# Altium PCB pkg.PcbDoc
Units mm, origin at the board's own origin, x right, y up, seen from the top; angles counter-clockwise.
Board outline 97.41 x 97.92 mm, 2 copper layers (Top Layer, Bottom Layer); 45 components, 53 nets, 208 pads, 34 vias.
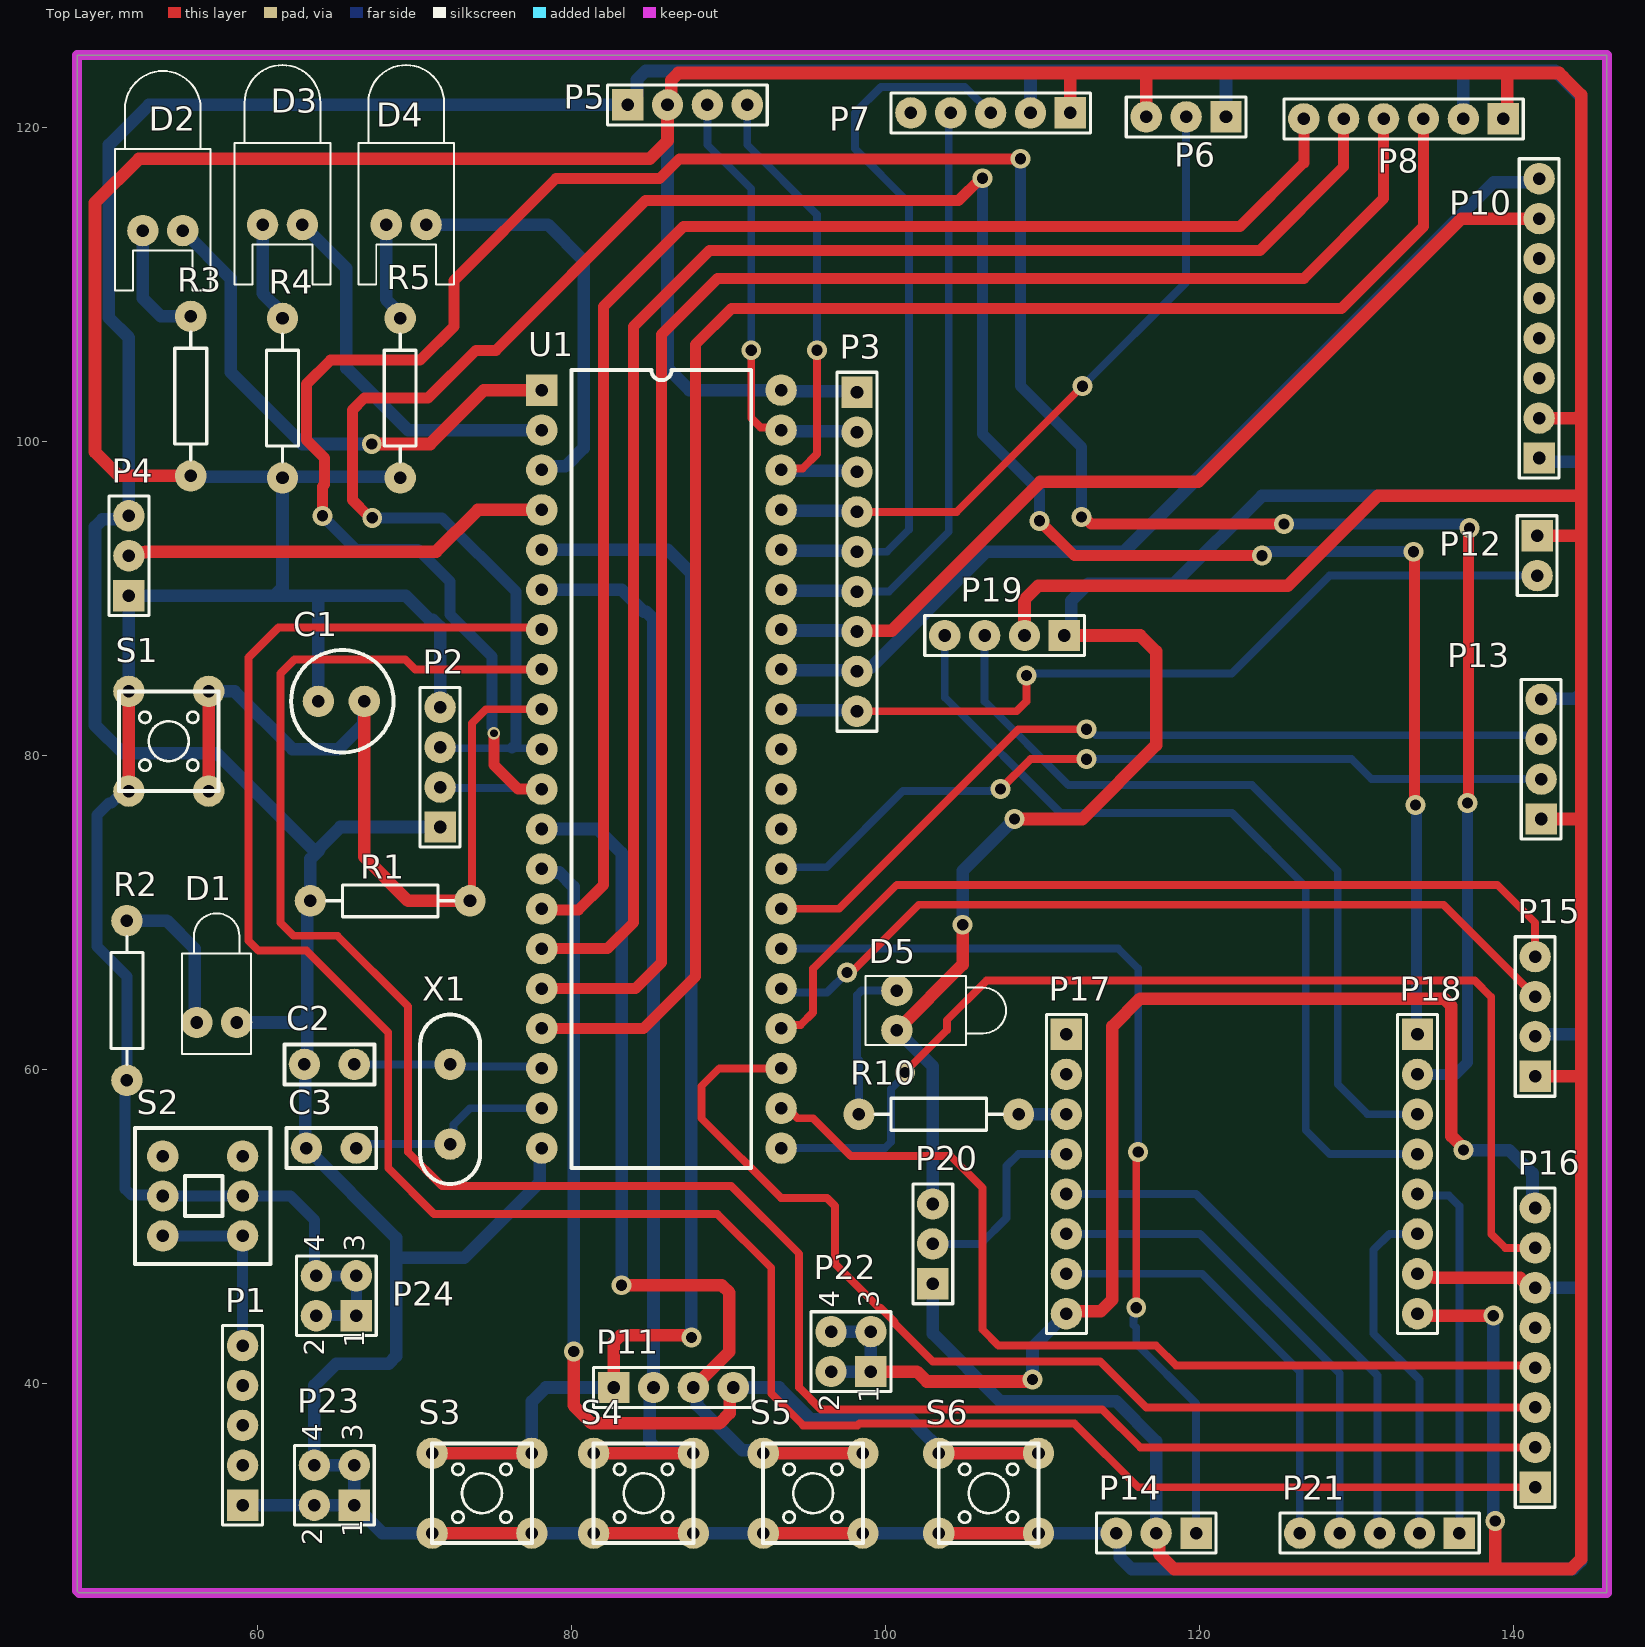
[diagram p0: Top Layer view]
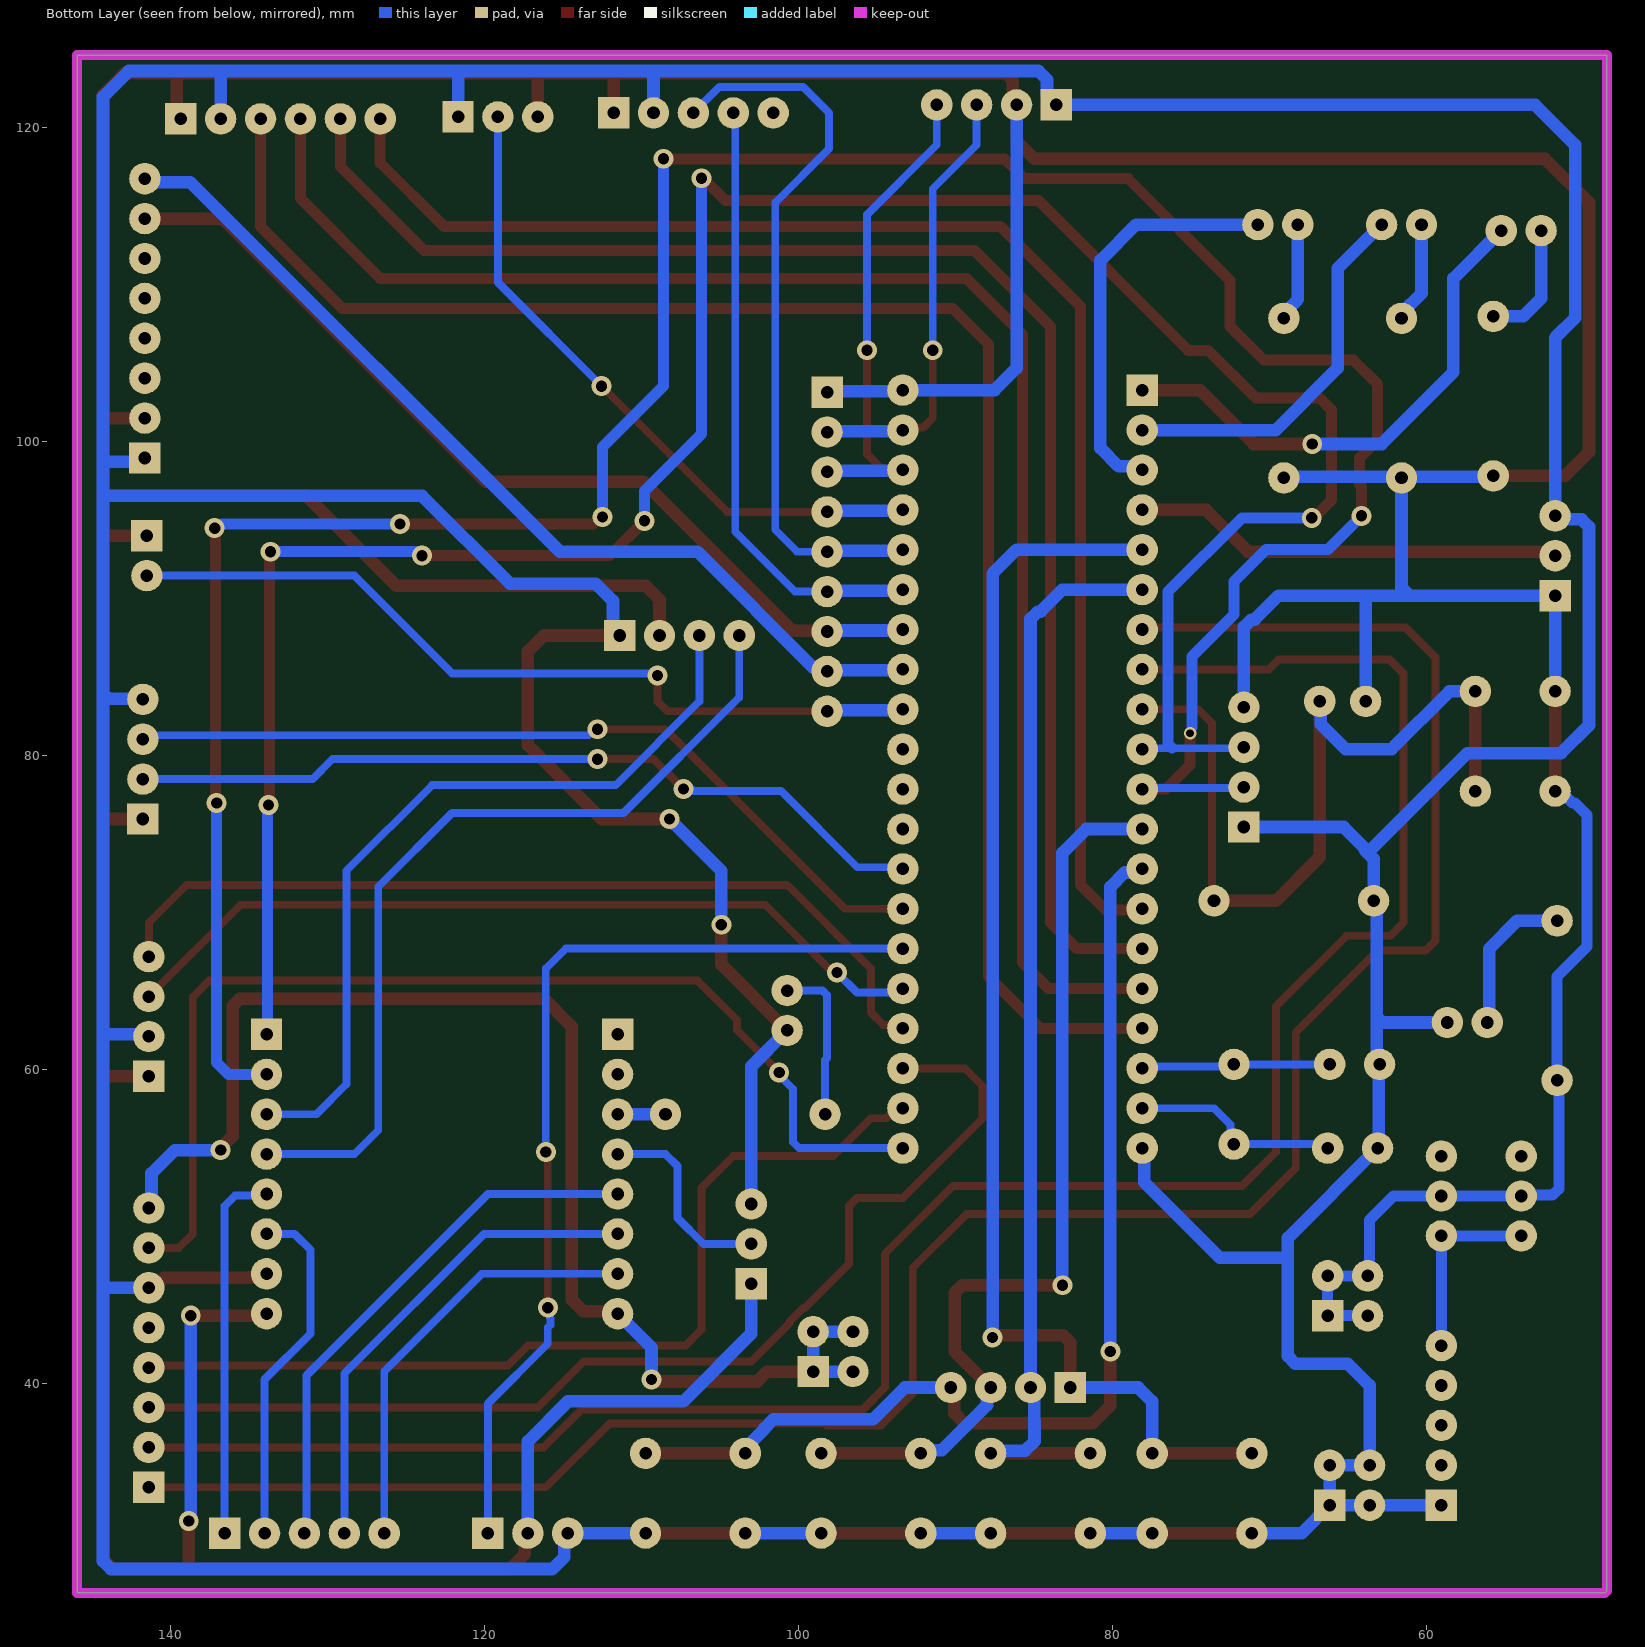
[diagram p1: Bottom Layer view, seen from below]

## Layer stack, top to bottom
Top Solder: solder mask 0.0102, Solder Resist, Dk 3.5
Top Layer: signal copper 0.0356
Dielectric 1: dielectric 0.32, FR-4, Dk 4.8
Bottom Layer: signal copper 0.0356
Bottom Solder: solder mask 0.0102, Solder Resist, Dk 3.5

## Board outline
48.514,26.797 48.514,124.587 145.923,124.587 145.923,26.67 48.641,26.67

## Design rules (kind name [scope] priority, off if disabled: settings)
Clearance [All] p1: gap=0.254 ignorepadtopadclearanceinfootprint=FALSE except(0: Arc-Hole Track-Hole SMDPad-Hole THPad-Hole Via-Hole Fill-Hole Poly-Hole Region-Hole Text-Hole)
PolygonConnect [All] p1: connectstyle=Relief reliefconductorwidth=0.254 reliefentries=4 polygonreliefangle="90 Angle" airgapwidth=0.254
RoutingVias [All] p1: holewidth=0.711 width=1.27 viastyle="Through Hole" minholewidth=0.711 minwidth=1.27 maxholewidth=0.711 maxwidth=1.27
SolderMaskExpansion [All] p1: expansion=0.102 istentingtop=FALSE
Width [All] p1: maxlimit=0.9 minlimit=0.5 preferedwidth=0.5
30 further rules are at their usual default settings.

## Components (designator, comment, footprint, x,y, rotation, side; value= is the part's Value field where it differs from the comment)
C1 "10uf" 电解电容 63.881,83.439 r0 top
C2 "22pf" 瓷片电容 66.167,60.325 r180 top
C3 "22pf" 瓷片电容 66.294,54.991 r180 top
D1 "LED1" LED-1 57.404,62.992 r90 top
D2 "LED1" LED-0 53.975,113.411 r180 top
D3 "LED2" LED-0 61.595,113.792 r180 top
D4 "LED3" LED-0 69.469,113.792 r180 top
D5 "LED1" LED-1 100.711,63.754 r0 top
P1 "USB" HDR1X5 59.055,32.258 r90 top
P2 "USART" HDR1X4 71.628,75.438 r90 top
P3 "排阻" ResPack9 98.171,92.964 r0 top
P4 "BEEP" HDR1X3 51.816,90.17 r90 top
P5 "OLED" HDR1X4 83.566,121.412 r0 top
P6 "DHT11" HDR1X3 121.666,120.65 r180 top
P7 "BH1750" HDR1X5 111.76,120.904 r180 top
P8 "步进电机" HDR1X6 139.319,120.523 r180 top
P10 "ADXL345" HDR1X8 141.605,98.933 r90 top
P11 "按键" HDR1X4 82.677,39.751 r0 top
P12 "风扇" HDR1X2 141.478,93.98 r270 top
P13 "MAX30100" HDR1X4 141.732,75.946 r90 top
P14 "红外遥控" HDR1X3 119.761,30.48 r180 top
P15 "PCF8591" HDR1X4 141.351,59.563 r90 top
P16 "RFID" HDR1X8 141.351,33.401 r90 top
P17 "wifi1" HDR1X8 111.506,62.23 r270 top
P18 "wifi2" HDR1X8 133.858,62.23 r270 top
P19 "WIFI_OLED" HDR1X4 111.379,87.63 r180 top
P20 "WIFI_DHT11" HDR1X3 102.997,46.355 r90 top
P21 "WIFI_IO" HDR1X5 136.525,30.48 r180 top
P22 "3.3V" HDR2X2 99.06,40.767 r90 top
P23 "GND" HDR2X2 66.167,32.258 r90 top
P24 "VCC" HDR2X2 66.294,44.323 r90 top
R1 "Res2" AXIAL-0.4 68.453,70.739 r180 top value=10K
R2 "Res2" AXIAL-0.4 51.689,64.389 r90 top value=220
R3 "Res1" AXIAL-0.4 55.753,102.87 r270 top value=1K
R4 "Res2" AXIAL-0.4 61.595,102.743 r270 top value=1K
R5 "Res2" AXIAL-0.4 69.088,102.743 r270 top value=1K
R10 "Res2" AXIAL-0.4 103.378,57.15 r180 top value=1K
S1 "SW-PE2" KEYTOUCH 51.816,84.074 r0 top
S2 "自锁开关" 自锁开关 59.055,49.403 r180 top
S3 "SW-PE2" KEYTOUCH 77.47,35.56 r270 top
S4 "SW-PE2" KEYTOUCH 81.407,30.48 r90 top
S5 "SW-PE2" KEYTOUCH 98.552,35.56 r270 top
S6 "SW-PE2" KEYTOUCH 103.378,30.48 r90 top
U1 "STC89C52" DIP40 78.105,103.251 r0 top
X1 "XTAL（晶振11.0592m）" XTAL 72.263,60.325 r270 top

## Footprints (in the part's own frame and the unit in brackets; to place one, negate y for a bottom-side part, rotate by r counter-clockwise, add the part's x,y. Pads: shape width x height; smd on the part's side, far side on the other; paste and mask are expansions set on the pad)
AXIAL-0.4 [mm] "Axial Device, Thru-Hole; 2 Leads; 0.4 in Pin Spacing"
  round 2 hole 0.8: 1(-5.08,0) 2(5.08,0)
  silkscreen extent -4.06,-1.02 4.06,1.02
DIP40 [mm]
  rect 2x2 hole 0.8: 1(0,0)
  round 2 hole 0.8: 2(0,-2.54) 3(0,-5.08) 4(0,-7.62) 5(0,-10.16) 6(0,-12.7) 7(0,-15.24) 8(0,-17.78) 9(0,-20.32) 10(0,-22.86) 11(0,-25.4) 12(0,-27.94) 13(0,-30.48) 14(0,-33.02) 15(0,-35.56) 16(0,-38.1) 17(0,-40.64) 18(0,-43.18) 19(0,-45.72) 20(0,-48.26) 21(15.24,-48.26) 22(15.24,-45.72) 23(15.24,-43.18) 24(15.24,-40.64) 25(15.24,-38.1) 26(15.24,-35.56) 27(15.24,-33.02) 28(15.24,-30.48) 29(15.24,-27.94) 30(15.24,-25.4) 31(15.24,-22.86) 32(15.24,-20.32) 33(15.24,-17.78) 34(15.24,-15.24) 35(15.24,-12.7) 36(15.24,-10.16) 37(15.24,-7.62) 38(15.24,-5.08) 39(15.24,-2.54) 40(15.24,0)
  silkscreen extent 1.91,-49.53 13.33,1.27
HDR1X2 [mm] "Connector; Header; 2 Position"
  rect 2x2 hole 0.8: 1(0,0)
  round 2 hole 0.8: 2(2.54,0)
  silkscreen extent -1.27,-1.27 3.81,1.27
HDR1X3 [mm] "Connector; Header; 3 Position"
  rect 2x2 hole 0.8: 1(0,0)
  round 2 hole 0.8: 2(2.54,0) 3(5.08,0)
  silkscreen extent -1.27,-1.27 6.35,1.27
HDR1X4 [mm] "Connector; Header; 4 Position"
  rect 2x2 hole 0.8: 1(0,0)
  round 2 hole 0.8: 2(2.54,0) 3(5.08,0) 4(7.62,0)
  silkscreen extent -1.27,-1.27 8.89,1.27
HDR1X5 [mm] "Connector; Header; 5 Position"
  rect 2x2 hole 0.8: 1(0,0)
  round 2 hole 0.8: 2(2.54,0) 3(5.08,0) 4(7.62,0) 5(10.16,0)
  silkscreen extent -1.27,-1.27 11.43,1.27
HDR1X6 [mm] "Connector; Header; 6 Position"
  rect 2x2 hole 0.8: 1(0,0)
  round 2 hole 0.8: 2(2.54,0) 3(5.08,0) 4(7.62,0) 5(10.16,0) 6(12.7,0)
  silkscreen extent -1.27,-1.27 13.97,1.27
HDR1X8 [mm] "Connector; Header; 8 Position"
  rect 2x2 hole 0.8: 1(0,0)
  round 2 hole 0.8: 2(2.54,0) 3(5.08,0) 4(7.62,0) 5(10.16,0) 6(12.7,0) 7(15.24,0) 8(17.78,0)
  silkscreen extent -1.27,-1.27 19.05,1.27
HDR2X2 [mm] "Connector; Header; 2x2 Position"
  rect 2x2 hole 0.8: 1(0,0)
  round 2 hole 0.8: 2(0,2.54) 3(2.54,0) 4(2.54,2.54)
  silkscreen extent -1.27,-1.27 3.81,3.81
KEYTOUCH [mm] "轻触开关"
  round 2 hole 0.8: 1(0,-6.35) 1(0,0) 2(5.08,-6.35) 2(5.08,0)
  Top Layer lines w0.8: 0,-6.35 0,0 ; 5.08,-6.35 5.08,0 5.08,0.127
  silkscreen extent -0.64,-6.35 5.71,0
LED-0 [mm] "LED; 2 Leads"
  round 2 hole 0.8: 1(1.27,0) 2(-1.27,0)
  silkscreen extent -3.05,-10.16 3.05,3.81
LED-1 [mm] "Typical RED GaAs LED; 2 Leads"
  round 2 hole 0.8: 1(0,1.27) 2(0,-1.27)
  silkscreen extent -2,-2.2 6.95,2.2
ResPack9 [mm]
  rect 2x2 hole 0.8: 1(0,10.16)
  round 2 hole 0.8: 2(0,7.62) 3(0,5.08) 4(0,2.54) 5(0,0) 6(0,-2.54) 7(0,-5.08) 8(0,-7.62) 9(0,-10.16)
  silkscreen extent -1.27,-11.43 1.27,11.43
XTAL [mm]
  round 2 hole 0.8: 1(5.08,0) 2(0,0)
  silkscreen extent -3.18,-1.91 7.62,1.91
瓷片电容 [mm] "104"
  round 2 hole 0.8: 1(0,0) 2(3.175,0)
  silkscreen extent -1.27,-1.27 4.44,1.27
电解电容 [mm]
  round 2 hole 0.8: 1(0,0) 2(2.921,0)
  silkscreen extent -1.74,-3.26 4.79,3.26
自锁开关 [mm]
  round 2 hole 0.8: 1(0,0) 2(0,-2.54) 3(0,-5.08) 4(5.08,-5.08) 5(5.08,-2.54) 6(5.08,0)
  silkscreen extent -1.78,-6.86 6.86,1.78

## Part data
C1: library part 电解电容
C2 C3: library part 瓷片电容
D1 D5: "Typical RED GaAs LED", LatestRevisionDate=08-Jul-2005, LatestRevisionNote="Mech Layer 1 removed.", PackageReference=LED-1, Published=8-Jun-2000, Publisher="Altium Limited"
D2 D3 D4: library part LED0, "Typical INFRARED GaAs LED", LatestRevisionDate=08-Jul-2005, LatestRevisionNote="Mech Layer 1 removed.", PackageDescription="LED; 2 Leads", PackageReference=LED-0, Published=8-Jun-2000, Publisher="Altium Limited"
P1 P7 P21: library part "Header 5", "Header, 5-Pin", LatestRevisionDate=17-Jul-2002, LatestRevisionNote="Re-released for DXP Platform.", Publisher="Altium Limited"
P2 P5 P11 P13 P15 P19: library part "Header 4", "Header, 4-Pin", LatestRevisionDate=17-Jul-2002, LatestRevisionNote="Re-released for DXP Platform.", Publisher="Altium Limited"
P3: library part "Res Pack9"
P4 P6 P14 P20: library part "Header 3", "Header, 3-Pin", LatestRevisionDate=17-Jul-2002, LatestRevisionNote="Re-released for DXP Platform.", Publisher="Altium Limited"
P8: library part "Header 6", "Header, 6-Pin", LatestRevisionDate=17-Jul-2002, LatestRevisionNote="Re-released for DXP Platform.", Publisher="Altium Limited"
P10 P16 P17 P18: library part "Header 8", "Header, 8-Pin", LatestRevisionDate=17-Jul-2002, LatestRevisionNote="Re-released for DXP Platform.", Publisher="Altium Limited"
P12: library part "Header 2", "Header, 2-Pin", LatestRevisionDate=17-Jul-2002, LatestRevisionNote="Re-released for DXP Platform.", Publisher="Altium Limited"
P22 P23 P24: library part "Header 2X2", "Header, 2-Pin, Dual row", LatestRevisionDate=17-Jul-2002, LatestRevisionNote="Re-released for DXP Platform.", Publisher="Altium Limited"
R1 R2 R4 R5 R10: "Resistor", LatestRevisionDate=17-Jul-2002, LatestRevisionNote="Re-released for DXP Platform.", PackageDescription="Axial Device, Thru-Hole; 2 Leads; 0.4 in Pin Spacing", PackageReference=AXIAL-0.4, Published=8-Jun-2000, Publisher="Altium Limited"
R3: library part Res2, "Resistor", LatestRevisionDate=17-Jul-2002, LatestRevisionNote="Re-released for DXP Platform.", PackageDescription="Axial Device, Thru-Hole; 2 Leads; 0.4 in Pin Spacing", PackageReference=AXIAL-0.4, Published=8-Jun-2000, Publisher="Altium Limited"
X1: library part XTAL（晶振）

## Via types
v1: diameter 1.27, hole 0.711, Top Layer to Bottom Layer, 33 vias
v2: diameter 0.8, hole 0.5, Top Layer to Bottom Layer, 1 vias

## Nets (pads, with @x,y where several pads share a name; then routed paths per layer and width w, separated by ;. In a path a pad name is that pad's centre, name@x,y a point inside that pad or via, vN(x,y) a via of type N, cw(c..) or ccw(c..) an arc to the next point about the centre after c; other vN are vias at no path point)
3.3V: P16.8 P17.8 P22.1 P22.2 P22.3 P22.4 | length 82.6
  Top Layer w0.8: P22.1 101.981,40.767 102.616,40.132 v1@108.888,40.132 ; v1@109.25,40.169 109.34,40.259 v1(109.347,40.259) ; P17.8 111.674,44.618 113.706,44.618 114.427,45.339 114.427,62.738 116.205,64.516 135.548,64.516 136.017,64.047 136.017,55.753 v1@136.652,55.118
  Bottom Layer w0.8: P22.2 P22.1 P22.3 P22.4 ; v1(109.347,40.259) 109.347,42.291 P17.8 ; v1(136.779,54.864) 139.7,54.864 141.183,53.381 141.183,51.349 P16.8
ADXL_SDA: P3.7 P10.7 U1.34 | length 59.2
  Top Layer w0.8: P3.7 98.212,87.925 100.371,87.925 109.855,97.409 119.888,97.409 136.652,114.173 P10.7
  Bottom Layer w0.8: U1.34 93.408,87.947 98.108,87.947 P3.7
AXDL_SCL: P3.8 P10.8 U1.33 | length 61.3
  Bottom Layer w0.8: U1.33 93.408,85.407 98.108,85.407 P3.8 98.401,85.574 99.036,85.574 106.426,92.964 115.189,92.964 138.708,116.483 141.375,116.483 P10.8
BEEP: P4.2 U1.4 | length 27.5
  Top Layer w0.8: P4.2 52.046,92.94 52.86,92.94 52.885,92.964 71.374,92.964 74.041,95.631 U1.4
BH1750_SCL: P3.5 P7.3 U1.36 | length 46.7
  Bottom Layer w0.5: P3.5 100.076,92.964 101.473,94.361 101.473,115.189 98.044,118.618 98.044,120.904 99.695,122.555 105.029,122.555 P7.3
  Bottom Layer w0.8: U1.36 93.408,93.027 98.108,93.027 P3.5
BH1750_SDA: P3.6 P7.4 U1.35 | length 39
  Bottom Layer w0.5: P3.6 100.203,90.424 104.013,94.234 104.013,120.777 P7.4
  Bottom Layer w0.8: U1.35 93.408,90.487 98.108,90.487 P3.6
D3: P18.5 P21.1 | length 23.8
  Bottom Layer w0.5: P18.5 133.96,51.968 135.865,51.968 136.525,51.308 P21.1
D4: P18.6 P21.2 | length 22.5
  Bottom Layer w0.5: P18.6 132.08,49.53 131.064,48.514 131.064,43.18 133.985,40.259 P21.2
D6: P17.5 P21.3 | length 34.7
  Bottom Layer w0.5: P17.5 119.761,52.07 131.318,40.513 131.318,30.607 P21.3
D7: P17.6 P21.4 | length 31.2
  Bottom Layer w0.5: P17.6 120.015,49.53 128.905,40.64 P21.4
D8: P17.7 P21.5 | length 27.7
  Bottom Layer w0.5: P17.7 120.142,46.99 126.365,40.767 P21.5
DHT11_DATA: P3.4 P6.2 U1.37 | length 42.4
  Top Layer w0.5: P3.4 104.521,95.504 v1(112.522,103.505)
  Bottom Layer w0.5: v1(112.522,103.505) 119.126,110.109 P6.2
  Bottom Layer w0.8: U1.37 93.408,95.567 98.108,95.567 P3.4
FEE: P3.9 P12.2 U1.32 | length 52.4
  Top Layer w0.5: P3.9 108.331,82.804 108.966,83.439 v1(108.966,85.09)
  Bottom Layer w0.5: v1@109.22,85.217 122.035,85.217 128.258,91.44 P12.2
  Bottom Layer w0.8: U1.32 93.408,82.867 98.108,82.867 P3.9
GND: C2.2 C3.2 D1.2 D5.2 P1.1 P2.1 P4.3 P5.1 P6.1 P7.2 P8.2 P10.1 P13.4 P14.3 P15.2 P16.6 P18.7 P19.1 P20.3 P23.1 P23.2 P23.3 P23.4 R1.2 S3.2 S4.1 S5.2 S6.1 U1.20 | length 504.5
  Top Layer w0.8: D5.2 104.902,66.675 v1(104.902,69.215) ; v1(108.204,75.946) 112.522,75.946 117.221,80.645 117.221,86.614 116.205,87.63 P19.1 ; P18.7 134.088,46.76 134.902,46.76 134.927,46.736 140.391,46.736 141.026,46.101 P16.6
  Bottom Layer w0.5: R1.2@63.182,70.143 R1.2@63.627,70.587
  Bottom Layer w0.8: D1.2 62.801,62.992 63.182,63.373 ; P1.1 P23.2 P23.1 ; 63.817,73.977 65.278,75.438 P2.1 ; S3.2@71.12,30.48 67.945,30.48 P23.1 ; S3.2@77.47,30.48 S4.1@81.407,30.48 ; U1.20 77.978,54.864 77.978,52.832 73.152,48.006 68.834,48.006 ; S4.1@87.757,30.48 S5.2@92.202,30.48 ; S5.2@98.552,30.48 S6.1@103.378,30.48 ; D5.2 102.997,60.198 P20.3 ; v1(104.902,69.215) 104.902,72.644 v1@107.823,75.565 ; P7.2 109.22,123.571 ; S6.1@109.728,30.48 P14.3 114.911,30.25 114.911,28.941 115.658,28.194 143.764,28.194 144.272,28.702 144.272,46.355 ; P19.1 111.801,88.052 111.801,89.83 112.903,90.932 118.364,90.932 123.952,96.52 144.272,96.52 ; P6.1 121.666,123.571 ; P8.2 136.779,123.571 ; P16.6 144.018,46.101 144.272,46.355 ; P15.2 141.478,62.23 144.272,62.23 ; P10.1 141.859,98.679 144.272,98.679 ; P13.4 141.773,83.607 143.932,83.607 144.272,83.947 ; 63.182,63.373 63.182,60.515 C2.2 63.055,60.261 63.055,55.054 C3.2 68.834,49.276 68.834,48.006 ; 63.182,63.373 63.182,70.143 63.182,70.549 R1.2 63.373,73.406 63.944,73.977 63.563,73.977 57.404,80.137 51.435,80.137 49.657,81.915 49.657,94.552 50.126,95.02 51.586,95.02 P4.3 51.816,106.588 50.546,107.858 50.546,118.872 53.086,121.412 P5.1 84.166,122.012 84.166,123.028 84.709,123.571 109.22,123.571 ; P23.1 P23.3 P23.4 63.627,39.878 65.024,41.275 68.365,41.275 68.834,41.744 68.834,48.006 ; 109.22,123.571 121.666,123.571 ; 121.666,123.571 136.779,123.571 ; 136.779,123.571 142.621,123.571 144.272,121.92 144.272,98.679 ; 144.272,46.355 144.272,62.23 ; 144.272,62.23 144.272,83.947 ; 144.272,83.947 144.272,96.52 ; 144.272,96.52 144.272,98.679
HRST: C1.2 R1.1 S1.2 U1.9 | length 47.5
  Top Layer w0.5: R1.1 73.66,70.866 73.66,82.042 74.549,82.931 U1.9
  Top Layer w0.8: C1.2 66.802,73.533 69.596,70.739 R1.1
  Bottom Layer w0.8: S1.2@56.896,84.074 58.547,84.074 62.23,80.391 65.151,80.391 66.745,81.985 66.745,83.382 C1.2
IN1: P8.6 U1.14 | length 92.6
  Top Layer w0.7: U1.14 78.196,70.14 80.427,70.14 82.042,71.755 82.042,108.585 87.122,113.665 122.555,113.665 126.619,117.729 P8.6
IN2: P8.5 U1.15 | length 97
  Top Layer w0.7: U1.15 82.296,67.691 83.947,69.342 83.947,107.315 88.773,112.141 123.825,112.141 129.159,117.475 P8.5
IN3: P8.4 U1.16 | length 102.9
  Top Layer w0.7: U1.16 84.074,65.151 85.725,66.802 85.725,106.807 89.281,110.363 126.619,110.363 131.699,115.443 P8.4
IN4: P8.3 U1.17 | length 107.7
  Top Layer w0.7: U1.17 84.582,62.611 87.884,65.913 87.884,106.172 90.17,108.458 129.032,108.458 134.239,113.665 P8.3
IRRE: P14.1 U1.26 | length 61
  Top Layer w0.5: v1(115.951,44.831) 115.951,54.61 v1(116.078,54.737)
  Bottom Layer w0.5: U1.26 114.808,67.691 116.078,66.421 v1(116.078,54.737) ; v1(115.951,44.831) 115.804,44.684 115.804,44.184 115.773,44.153 115.773,43.739 115.951,43.561 115.951,42.545 119.761,38.735 P14.1
KEY1: P11.1 S3.1 U1.5 | length 75.8
  Top Layer w0.8: P11.1 82.677,42.621 83.146,43.09 87.134,43.09 87.208,43.016 87.54,43.016 v1(87.63,42.926)
  Bottom Layer w0.8: S3.1@77.47,35.56 77.47,38.862 78.359,39.751 P11.1 ; U1.5 86.106,93.091 87.63,91.567 v1(87.63,42.926)
KEY2: P11.2 S4.2 U1.6 | length 63.5
  Bottom Layer w0.8: U1.6 83.185,90.551 84.582,89.154 84.748,89.154 85.217,88.685 P11.2 84.987,39.521 84.987,37.597 84.963,37.572 84.963,36.322 85.557,35.728 87.589,35.728 S4.2@87.757,35.56
KEY3: P11.3 S5.1 U1.12 | length 54
  Top Layer w0.8: v1(83.185,46.26) 89.574,46.26 90.043,45.791 90.043,42.037 P11.3
  Bottom Layer w0.8: U1.12 81.661,75.311 83.185,73.787 v1(83.185,46.26) ; P11.3 87.987,39.521 87.987,38.632 90.875,35.744 92.018,35.744 S5.1@92.202,35.56
KEY4: P11.4 S6.2 U1.13 | length 63
  Top Layer w0.8: v1(80.137,42.049) 80.137,38.608 81.28,37.465 89.408,37.465 90.067,38.124 90.067,39.521 P11.4
  Bottom Layer w0.8: U1.13 78.335,72.541 79.224,72.541 80.137,71.628 v1(80.137,42.049) ; P11.4 93.218,39.751 95.25,37.719 101.6,37.719 102.166,37.153 102.166,37.097 103.378,35.885 S6.2@103.378,35.56
LED1: D2.2 U1.1 | length 33.4
  Top Layer w0.8: v1(67.279,99.822) 70.993,99.822 74.422,103.251 U1.1
  Bottom Layer w0.8: D2.2 58.293,110.363 58.293,104.394 62.865,99.822 v1(67.279,99.822)
LED2: D3.2 U1.2 | length 24.4
  Bottom Layer w0.8: D3.2 65.659,110.998 65.659,104.648 69.596,100.711 U1.2
LED3: D4.2 U1.3 | length 26.2
  Bottom Layer w0.8: D4.2 78.486,113.792 80.772,111.506 80.772,99.568 79.605,98.401 78.335,98.401 U1.3
M_MFMISO: P16.4 U1.22 | length 60.1
  Top Layer w0.5: U1.22 93.751,57.531 94.386,56.896 95.377,56.896 97.79,54.483 104.14,54.483 106.172,52.451 106.172,43.434 107.188,42.418 117.221,42.418 118.491,41.148 141.224,41.148 P16.4
M_MFMOSI: P16.3 U1.23 | length 70.5
  Top Layer w0.5: U1.23 89.408,60.071 88.265,58.928 88.265,56.896 93.345,51.816 96.266,51.816 96.774,51.308 96.774,47.625 99.588,44.811 99.683,44.811 100.564,43.93 100.564,43.835 102.997,41.402 113.665,41.402 116.586,38.481 P16.3
M_MFRST: P16.7 U1.21 | length 70.8
  Top Layer w0.5: v1(101.219,59.817) 103.896,62.494 103.896,63.129 106.426,65.659 137.502,65.659 138.557,64.604 138.557,49.53 139.446,48.641 P16.7
  Bottom Layer w0.5: U1.21 99.949,54.991 100.33,55.372 100.33,58.747 101.219,59.636 v1(101.219,59.817)
M_MFSCK: P16.2 U1.8 | length 137.3
  Top Layer w0.5: U1.8 70.047,85.471 69.412,86.106 62.357,86.106 61.468,85.217 61.468,69.342 62.293,68.517 65.087,68.517 69.596,64.008 69.596,54.737 71.755,52.578 90.17,52.578 94.488,48.26 94.488,39.751 95.885,38.354 113.792,38.354 116.205,35.941 P16.2
M_MFSDA: P16.1 U1.7 | length 143.7
  Top Layer w0.5: U1.7 77.978,88.138 61.341,88.138 59.436,86.233 59.436,68.199 60.071,67.564 63.119,67.564 68.326,62.357 68.326,53.721 71.247,50.8 89.281,50.8 92.71,47.371 92.71,39.37 94.742,37.338 98.203,37.338 98.33,37.465 112.014,37.465 116.078,33.401 P16.1
MAX_SCL: P13.3 U1.27 | length 53.4
  Top Layer w0.5: U1.27 97.028,70.231 108.458,81.661 v1(112.776,81.661)
  Bottom Layer w0.5: v1(112.776,81.661) 112.984,81.661 113.369,81.276 141.482,81.276 P13.3
MAX_SDA: P13.2 U1.28 | length 51.3
  Top Layer w0.5: v1(107.315,77.851) 109.22,79.756 v1(112.776,79.756)
  Bottom Layer w0.5: U1.28 93.447,72.873 96.241,72.873 101.092,77.724 106.68,77.724 v1@106.807,77.851 ; v1(112.776,79.756) 129.667,79.756 130.937,78.486 P13.2
NetD1_1: D1.1 R2.2 | length 9.8
  Bottom Layer w0.8: R2.2 54.229,69.469 56.007,67.691 56.007,63.119 D1.1
NetD2_1: D2.1 R3.1 | length 7.8
  Bottom Layer w0.8: D2.1 52.705,109.093 53.848,107.95 R3.1
NetD3_1: D3.1 R4.1 | length 6.5
  Bottom Layer w0.8: D3.1 60.325,109.418 61.595,108.148 R4.1
NetD4_1: D4.1 R5.1 | length 6.3
  Bottom Layer w0.8: D4.1 68.199,109.037 69.088,108.148 R5.1
NetD5_1: D5.1 R10.2 | length 10.3
  Bottom Layer w0.5: R10.2 98.298,60.591 98.171,60.718 98.171,64.731 98.464,65.024 D5.1
OLED_SCL: P3.2 P5.3 U1.39 | length 28.2
  Top Layer w0.5: v1(91.44,105.791) 91.44,101.473 92.036,100.877 93.179,100.877 U1.39
  Bottom Layer w0.5: P5.3 88.646,118.872 91.44,116.078 91.44,111.928 v1(91.44,105.791)
  Bottom Layer w0.8: U1.39 93.408,100.647 98.108,100.647 P3.2
OLED_SDA: P3.3 P5.4 U1.38 | length 31.7
  Top Layer w0.5: U1.38 93.447,98.273 94.717,98.273 95.631,99.187 v1(95.631,105.791)
  Bottom Layer w0.5: P5.4 91.186,118.872 95.631,114.427 v1(95.631,105.791)
  Bottom Layer w0.8: U1.38 93.408,98.108 98.108,98.108 P3.3
PCF_SCL: P15.4 U1.24 | length 56.6
  Top Layer w0.5: U1.24 93.574,62.84 94.59,62.84 95.377,63.627 95.377,66.421 100.711,71.755 138.938,71.755 141.351,69.342 P15.4
PCF_SDA: P15.3 U1.25 | length 52.8
  Top Layer w0.5: v1(97.536,66.167) 97.79,66.167 102.108,70.485 135.509,70.485 P15.3
  Bottom Layer w0.5: U1.25 93.599,64.897 96.266,64.897 v1(97.536,66.167)
RXD: P2.3 P18.1 U1.10 | length 160.1
  Top Layer w0.7: v1@67.056,95.25 66.04,96.266 66.04,101.981 66.802,102.743 70.866,102.743 73.914,105.791 75.184,105.791 84.709,115.316 104.648,115.316 106.076,116.744 v1(106.172,116.744) ; v1(109.791,94.932) 112.014,92.71 v1(123.952,92.71) ; v1(133.604,92.964) 133.667,92.9 133.667,76.898 v1(133.731,76.835)
  Bottom Layer w0.5: P2.3 71.691,80.454 75.184,80.454 76.2,80.454 76.454,80.454 78.041,80.454 U1.10
  Bottom Layer w0.7: v1(67.31,95.123) 71.755,95.123 76.454,90.424 76.454,80.709 76.2,80.454 ; v1(106.172,116.744) 106.172,100.457 109.791,96.837 v1(109.791,94.932) ; v1(123.952,92.71) 124.206,92.964 v1(133.604,92.964) ; v1(133.731,76.835) 133.794,76.772 133.794,62.293 P18.1
TXD: P2.2 P18.2 U1.11 | length 181.5
  Top Layer w0.7: v1(64.135,95.25) 64.135,97.105 64.262,97.232 64.262,98.933 63.119,100.076 63.119,103.632 64.643,105.156 70.358,105.156 72.517,107.315 72.517,110.236 78.994,116.713 85.598,116.713 86.868,117.983 v1(108.585,117.983) ; v2(75.057,81.407) 75.057,79.375 76.581,77.851 U1.11 ; v1(112.465,95.18) 112.62,95.18 113.071,94.728 v1(125.363,94.728) ; v1(137.033,76.962) 137.096,77.025 137.096,94.397 v1(137.16,94.461)
  Bottom Layer w0.5: P2.2 71.691,77.915 78.041,77.915 U1.11
  Bottom Layer w0.7: v1(64.135,95.25) 66.285,93.1 70.222,93.1 72.263,91.059 72.263,88.962 74.93,86.295 74.93,81.788 ; v1(108.585,117.983) 108.585,103.505 112.465,99.625 v1(112.465,95.18) ; v1(125.363,94.728) 136.738,94.728 137.006,94.461 v1(137.16,94.461) ; P18.2 136.271,59.69 137.033,60.452 v1(137.033,76.962)
VCC: C1.1 P2.4 P3.1 P4.1 P5.2 P6.3 P7.1 P8.1 P10.2 P12.1 P13.1 P14.2 P15.1 P18.8 P19.2 P20.1 P24.1 P24.2 P24.3 P24.4 R2.1 R3.2 R4.2 R5.2 S1.1 S2.2 S2.5 U1.40 | length 493.5
  Top Layer w0.8: R3.2 51.181,97.79 49.657,99.314 49.657,115.189 52.451,117.983 84.963,117.983 86.106,119.126 P5.2 86.336,121.642 86.336,122.975 86.804,123.444 111.76,123.444 ; P19.2 108.839,89.916 109.728,90.805 125.603,90.805 131.318,96.52 144.272,96.52 ; P7.1 111.76,123.444 ; P6.3 116.586,123.444 ; P14.2 117.405,30.296 117.405,29.153 118.364,28.194 138.557,28.194 ; P18.8 133.985,44.323 v1(138.684,44.323) ; v1(138.811,31.242) 138.811,28.448 138.557,28.194 ; P8.1 139.573,120.777 139.573,123.444 ; P15.1 144.145,59.563 144.272,59.69 ; P12.1 144.145,93.98 144.272,93.853 ; P10.2 144.018,101.473 144.272,101.727 ; P13.1 144.145,75.946 144.272,75.819 ; 111.76,123.444 116.586,123.444 ; 116.586,123.444 139.573,123.444 ; 138.557,28.194 143.637,28.194 144.272,28.829 144.272,59.69 ; 139.573,123.444 142.875,123.444 143.129,123.19 144.272,122.047 144.272,101.727 ; 144.272,59.69 144.272,75.819 ; 144.272,75.819 144.272,93.853 ; 144.272,93.853 144.272,96.52 ; 144.272,96.52 144.272,101.727
  Bottom Layer w0.7: R2.1 51.689,65.913 49.784,67.818 49.784,76.2 50.546,76.962 50.702,76.962 51.464,77.724 S1.1@51.816,77.724 ; R2.1@52.197,59.309 52.163,59.309 51.562,58.708 51.562,52.404 51.972,51.994 53.924,51.994 S2.5 S2.2 62.103,51.943 63.627,50.419 63.627,46.99 P24.4 P24.3 P24.1 P24.2
  Bottom Layer w0.8: S1.1@51.816,84.074 P4.1 61.087,90.17 ; R3.2 55.816,97.727 69.025,97.727 R5.2 ; R4.2 61.595,90.678 61.087,90.17 ; C1.1 63.881,90.17 ; P2.4 71.628,88.177 71.159,88.646 70.949,88.646 69.425,90.17 63.881,90.17 ; P5.2 86.106,104.648 87.503,103.251 U1.40 93.408,103.188 98.108,103.188 P3.1 ; P20.1 102.997,43.18 107.315,38.862 114.681,38.862 117.221,36.322 P14.2 ; v1(138.684,44.323) 138.684,31.369 v1(138.811,31.242) ; 61.087,90.17 63.881,90.17
VCC_5V: P1.5 S2.1 S2.6 | length 12.1
  Bottom Layer w0.7: S2.6 S2.1 P1.5
WIFI_DATA: P17.4 P20.2 | length 12.8
  Bottom Layer w0.5: P20.2 106.045,48.895 107.696,50.546 107.696,53.848 108.458,54.61 P17.4
WIFI_LED: P17.3 R10.1 | length 3
  Bottom Layer w0.8: R10.1 P17.3
WIFI_SCL: P18.3 P19.3 | length 50.6
  Bottom Layer w0.5: P19.3 106.299,83.439 111.633,78.105 123.317,78.105 128.778,72.644 128.778,59.055 130.683,57.15 P18.3
WIFI_SDA: P18.4 P19.4 | length 55.2
  Bottom Layer w0.5: P19.4 103.759,83.693 111.125,76.327 122.047,76.327 126.746,71.628 126.746,56.134 128.27,54.61 P18.4
XTAL1: C3.1 U1.19 X1.1 | length 13.5
  Bottom Layer w0.5: C3.1 66.548,55.245 X1.1 72.492,55.474 72.492,56.49 73.533,57.531 U1.19
XTAL2: C2.1 U1.18 X1.2 | length 12
  Bottom Layer w0.5: C2.1 X1.2 72.39,60.198 77.978,60.198 U1.18
pads on no net: P1.2 P1.3 P1.4 P7.5 P10.3 P10.4 P10.5 P10.6 P16.5 P17.1 P17.2 S2.3 S2.4 U1.29 U1.30 U1.31

## Keep-outs
Keep-Out Layer:
  the board outline again, w0.654

## Text inside footprints (layer, text, board x,y; h text height)
P22: Top Overlay "1" at 99.568,38.735 h1.27 r90; Top Overlay "2" at 97.028,38.227 h1.27 r90; Top Overlay "4" at 97.028,44.831 h1.27 r90; Top Overlay "3" at 99.568,44.831 h1.27 r90
P23: Top Overlay "1" at 66.675,30.226 h1.27 r90; Top Overlay "2" at 64.135,29.718 h1.27 r90; Top Overlay "4" at 64.135,36.322 h1.27 r90; Top Overlay "3" at 66.675,36.322 h1.27 r90
P24: Top Overlay "1" at 66.802,42.291 h1.27 r90; Top Overlay "2" at 64.262,41.783 h1.27 r90; Top Overlay "4" at 64.262,48.387 h1.27 r90; Top Overlay "3" at 66.802,48.387 h1.27 r90